# Altium PCB SWS_LEFT.PcbDoc
Units mm, origin at the board's own origin, x right, y up, seen from the top; angles counter-clockwise.
Board outline 46.26 x 38.25 mm, 2 copper layers (Top Layer, Bottom Layer), stack 1.17 mm thick; 17 components, 20 nets, 88 pads, 92 vias.
Unrouted connection lines stored in the file: 1.
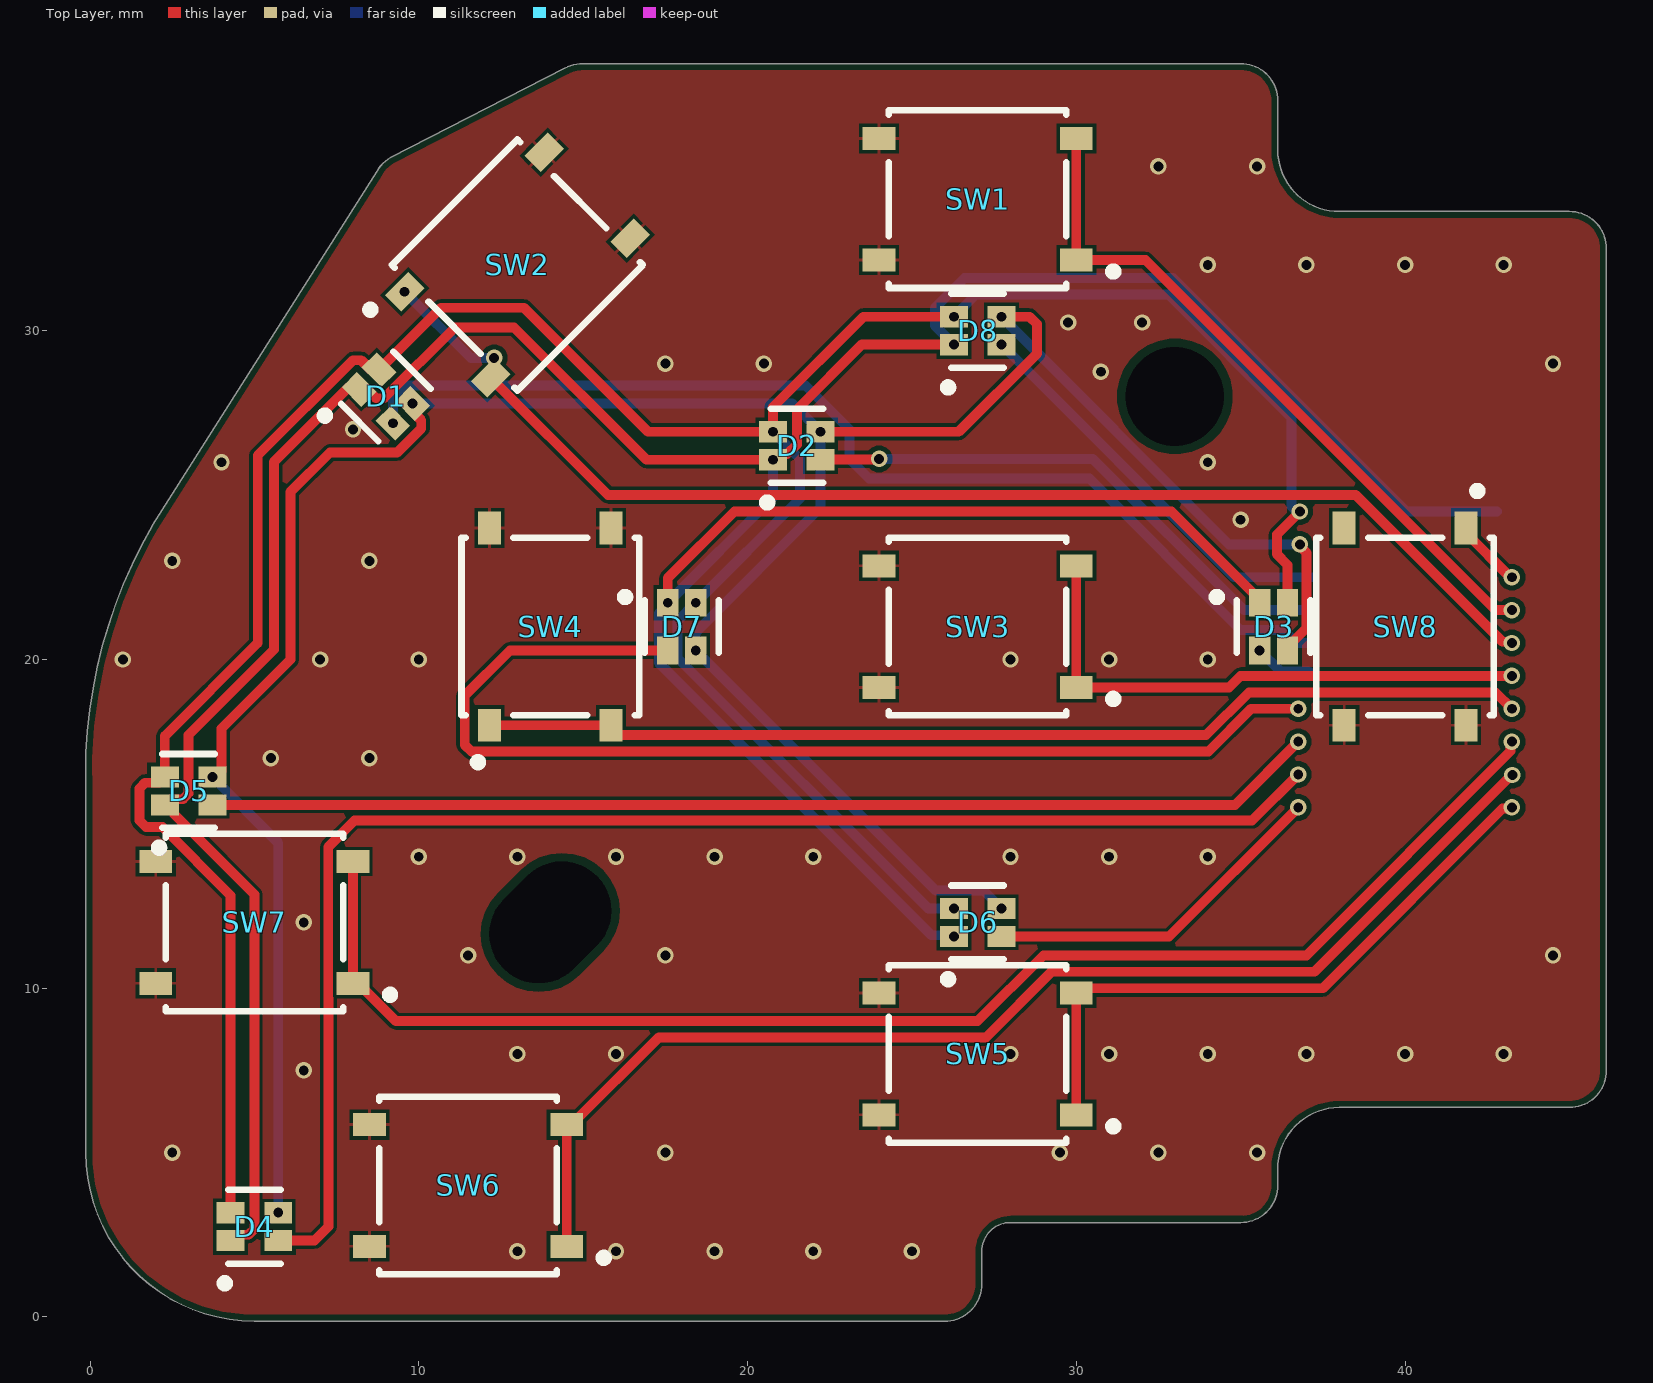
[diagram p0: Top Layer view]
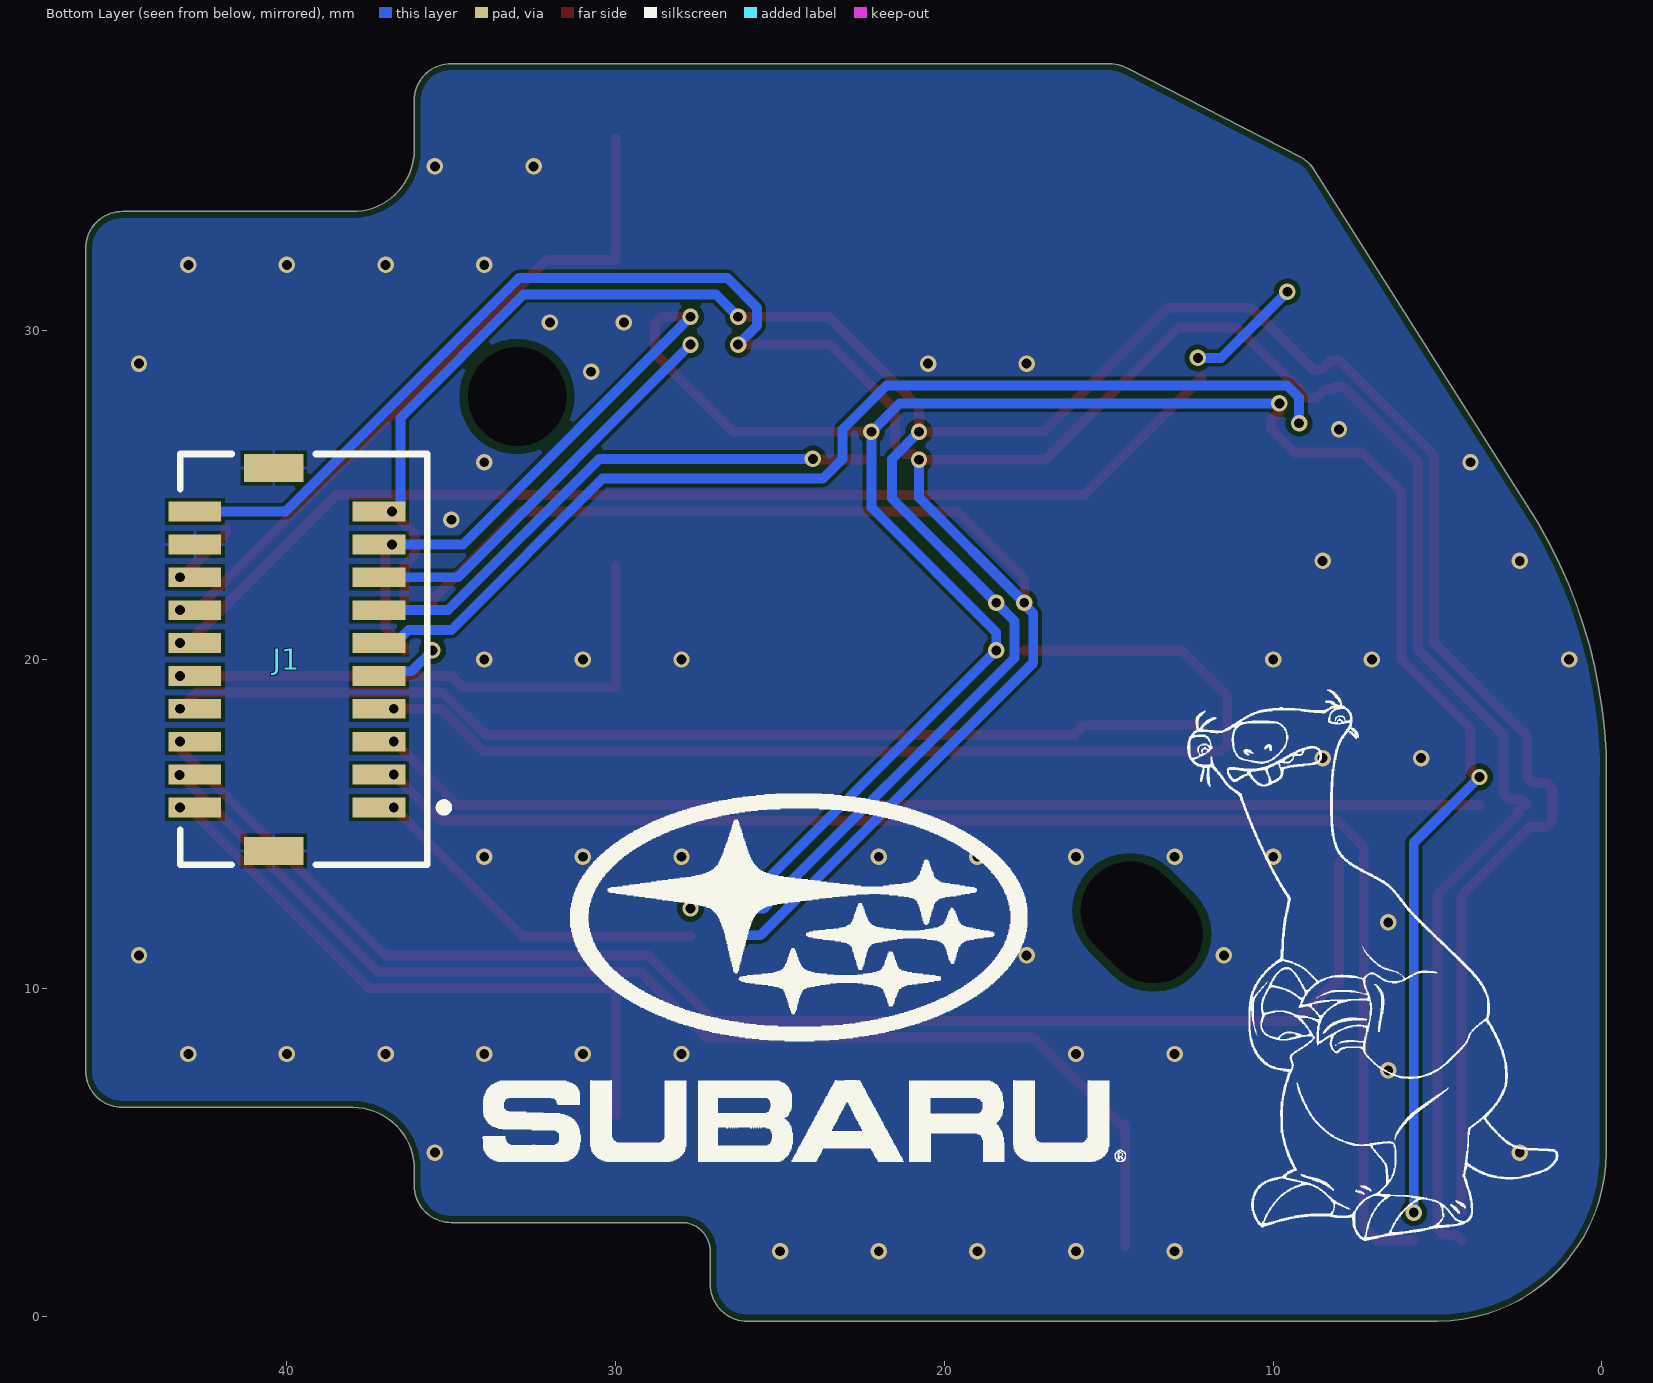
[diagram p1: Bottom Layer view, seen from below]
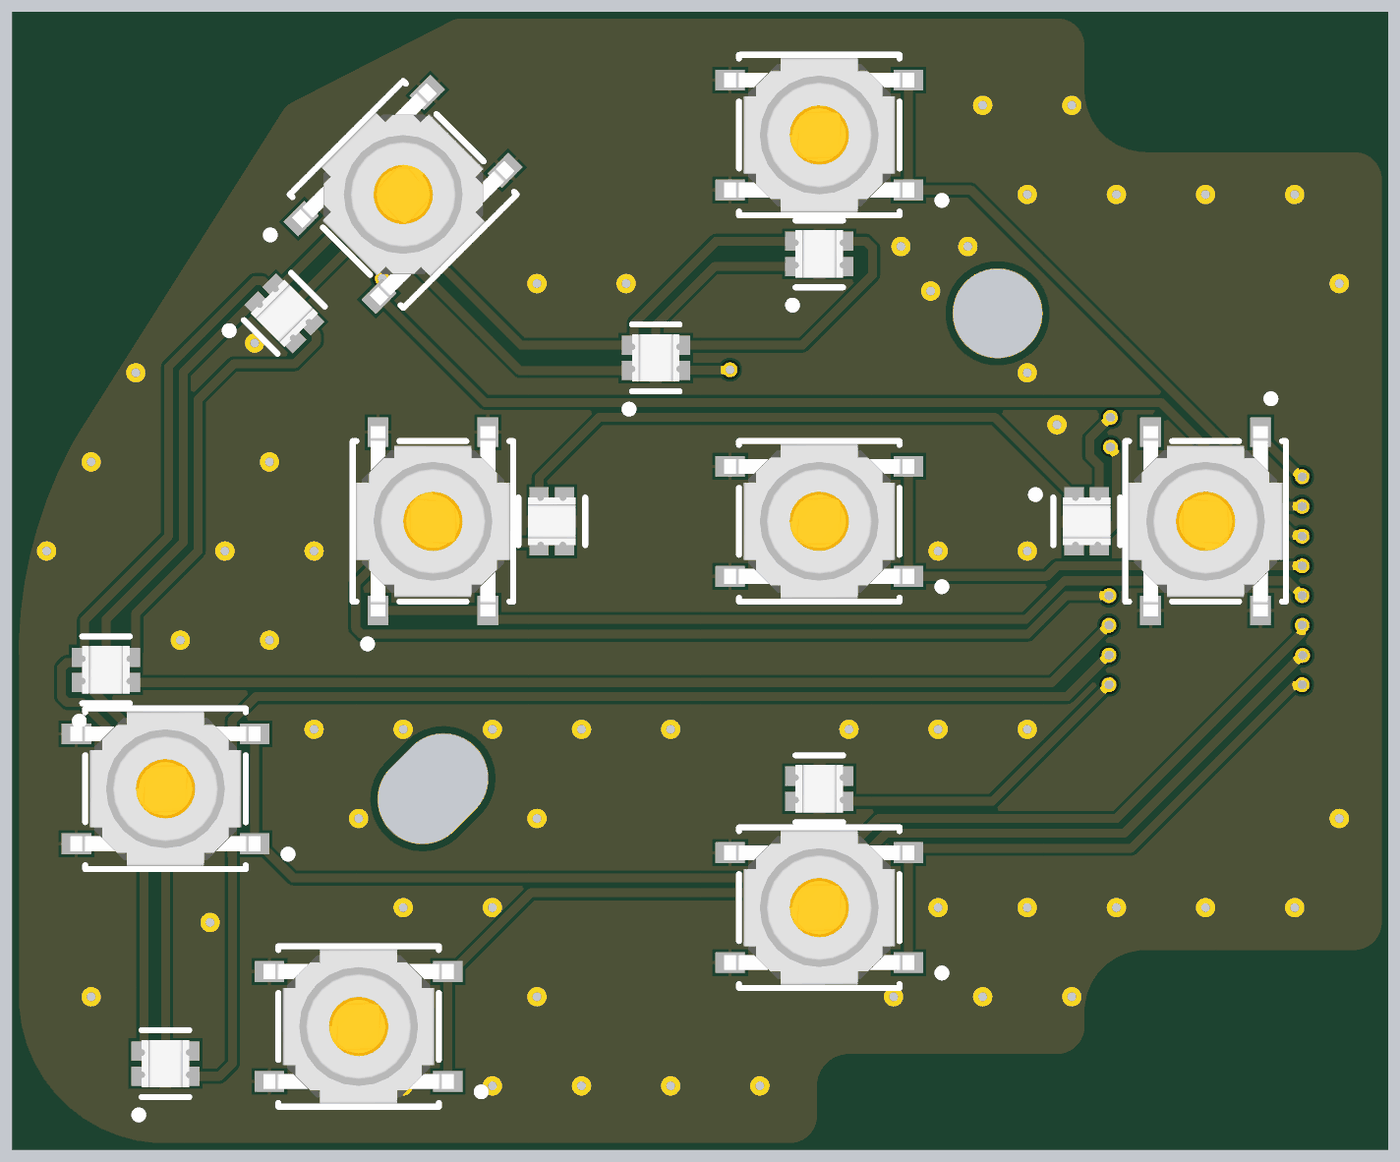
[diagram p2: 3D render of the assembled board from above, using the file's embedded part models]

## Layer stack, top to bottom
Top Solder: solder mask 0.0127, Solder Resist, Dk 3.8
Top Layer: signal copper 0.035
Dielectric: core 1.1, FR-4, Dk 4.5
Bottom Layer: signal copper 0.035
Bottom Solder: solder mask 0.0127, Solder Resist, Dk 3.8

## Board outline
4.999,-0.127 26,-0.127 ccw(c26,1) 27.127,1 27.127,2 cw(c28,2) 27.999,2.873 28,2.873 35,2.873 ccw(c35,4) 36.127,4 36.127,4.5 cw(c38,4.5) 37.999,6.373 38,6.373 45,6.373 ccw(c45,7.5) 46.127,7.5 46.127,32.5 ccw(c45,32.5) 45,33.627 38,33.627 cw(c38,35.5) 36.127,35.5 36.127,37 ccw(c35,37) 35,38.127 15,38.127 ccw(c15,37) 14.439,37.978 9.15,35.273 9.143,35.269 ccw(c9.707,34.293) 8.732,34.859 1.893,24.068 1.89,24.064 ccw(c14.99,16.5) -0.137,16.5 -0.127,16.451 -0.127,5 ccw(c5,5)

## Design rules (kind name [scope] priority, off if disabled: settings)
BoardOutlineClearance [All] p1: gap=0.2 ignorepadtopadclearanceinfootprint=FALSE
Clearance [All] p1: gap=0.102 ignorepadtopadclearanceinfootprint=FALSE except(0.127: Arc-Via Track-Via SMDPad-Via THPad-Via Via-Via Via-Fill Via-Poly Via-Region Via-Text; 0.25: Arc-Hole Track-Hole SMDPad-Hole THPad-Hole Via-Hole Fill-Hole Poly-Hole Region-Hole Text-Hole)
ComponentClearance [All] p1: gap=0.102 collisioncheckmode=3 verticalgap=0.102 showdistances=TRUE
DiffPairsRouting [All] p1: maxlimit=0.102 minlimit=0.102 mostfreqgap=0.102 toplayer_minwidth=0.102 toplayer_maxwidth=1816.048 toplayer_prefwidth=0.102 bottomlayer_minwidth=0.102 bottomlayer_maxwidth=1816.048 bottomlayer_prefwidth=0.102 maxuncoupledlength=12.7
Height [All] p1: minheight=0 maxheight=1816.048 prefheight=12.7
HoleSize [All] p1: absolutevalues=TRUE maxlimit=6.3 minlimit=0.2 maxpercent=80.000 minpercent=20.000
HoleToHoleClearance [All] p1: gap=0.25 allowstackedmicrovias=FALSE
MinimumAnnularRing [All] p1: minimumring=0.076
MinimumSolderMaskSliver [All] p1: minsoldermaskwidth=0
PlaneClearance [All] p1: clearance=0.102
PlaneConnect PlaneConnectPowerPads [InPadClass('PowerPads')] p1: planeconnectstyle=Direct reliefexpansion=0.508 reliefentries=4 reliefconductorwidth=0.254 reliefairgap=0.254
PlaneConnect [All] p2: pad.planeconnectstyle=Relief pad.reliefexpansion=0.3 pad.reliefentries=4 pad.reliefconductorwidth=0.102 pad.reliefairgap=0.102 via.planeconnectstyle=Direct via.reliefexpansion=0.3 via.reliefentries=4 via.reliefconductorwidth=0.127 via.reliefairgap=0.127
PolygonConnect PolygonConnectPowerPads [All vs (InPadClass('PowerPads'))] p1: connectstyle=Direct reliefconductorwidth=0.254 reliefentries=4 polygonreliefangle="90 Angle" airgapwidth=0.254
PolygonConnect [All] p2: thpad.connectstyle=Relief thpad.reliefconductorwidth=0.102 thpad.reliefentries=4 thpad.polygonreliefangle="90 Angle" thpad.airgapwidth=0.102 smdpad.connectstyle=Relief smdpad.reliefconductorwidth=0.102 smdpad.reliefentries=4 smdpad.polygonreliefangle="90 Angle" smdpad.airgapwidth=0.102 via.connectstyle=Direct via.reliefconductorwidth=0.127 via.reliefentries=4 via.polygonreliefangle="90 Angle" via.airgapwidth=0.127
RoutingVias [All] p1: holewidth=0.2 width=0.45 viastyle="Through Hole" minholewidth=0.2 minwidth=0.45 maxholewidth=6.3 maxwidth=6.55
SilkToSilkClearance [All] p1: silktosilkclearance=0
SilkToSolderMaskClearance [IsPad] p1: minsilkscreentomaskgap=0.102 clearancetoexposedcopper=TRUE
SolderMaskExpansion [All] p1: expansion=0.075 istentingtop=FALSE
Width [All] p1: maxlimit=1816.048 minlimit=0.102 preferedwidth=0.102
20 further rules are at their usual default settings.

## Components (designator, comment, footprint, x,y, rotation, side; value= is the part's Value field where it differs from the comment)
D1 "LTST-C19HE1WT" FP-LTST-C19HE1WT-MFG 9,28 r45 top locked
D2 "LTST-C19HE1WT" FP-LTST-C19HE1WT-MFG 21.5,26.5 r90 top locked
D3 "LTST-C19HE1WT" FP-LTST-C19HE1WT-MFG 36,21 r0 top locked
D4 "LTST-C19HE1WT" FP-LTST-C19HE1WT-MFG 5,2.75 r90 top locked
D5 "LTST-C19HE1WT" FP-LTST-C19HE1WT-MFG 3,16 r90 top locked
D6 "LTST-C19HE1WT" FP-LTST-C19HE1WT-MFG 27,12 r90 top locked
D7 "LTST-C19HE1WT" FP-LTST-C19HE1WT-MFG 18,21 r0 top locked
D8 "LTST-C19HE1WT" FP-LTST-C19HE1WT-MFG 27,30 r90 top locked
J1 "501190-2017" FP-501190-2017-MFG 40,20 r90 bottom
SW1 "PTS526SK15SMTR2LFS" FP-PTS526SK15SMTR2LFS-MFG 27,34 r180 top locked
SW2 "PTS526SK15SMTR2LFS" FP-PTS526SK15SMTR2LFS-MFG 13,32 r45 top locked
SW3 "PTS526SK15SMTR2LFS" FP-PTS526SK15SMTR2LFS-MFG 27,21 r180 top locked
SW4 "PTS526SK15SMTR2LFS" FP-PTS526SK15SMTR2LFS-MFG 14,21 r90 top locked
SW5 "PTS526SK15SMTR2LFS" FP-PTS526SK15SMTR2LFS-MFG 27,8 r180 top locked
SW6 "PTS526SK15SMTR2LFS" FP-PTS526SK15SMTR2LFS-MFG 11.5,4 r180 top locked
SW7 "PTS526SK15SMTR2LFS" FP-PTS526SK15SMTR2LFS-MFG 5,12 r180 top locked
SW8 "PTS526SK15SMTR2LFS" FP-PTS526SK15SMTR2LFS-MFG 40,21 r270 top locked

## Footprints (in the part's own frame and the unit in brackets; to place one, negate y for a bottom-side part, rotate by r counter-clockwise, add the part's x,y. Pads: shape width x height; smd on the part's side, far side on the other; paste and mask are expansions set on the pad)
FP-501190-2017-MFG [mm]
  rect 0.6x1.6 smd paste+0 mask+0: 1(-4.5,-2.8) 2(-4.5,2.8) 3(-3.5,-2.8) 4(-3.5,2.8) 5(-2.5,-2.8) 6(-2.5,2.8) 7(-1.5,-2.8) 8(-1.5,2.8) 9(-0.5,-2.8) 10(-0.5,2.8) 11(0.5,-2.8) 12(0.5,2.8) 13(1.5,-2.8) 14(1.5,2.8) 15(2.5,-2.8) 16(2.5,2.8) 17(3.5,-2.8) 18(3.5,2.8) 19(4.5,-2.8) 20(4.5,2.8)
  rect 0.85x1.8 smd paste+0 mask+0: 21(-5.825,0.4) 22(5.825,0.4)
  silkscreen extent -6.25,-4.9 6.25,3.24, body extent -6.15,-4.07 6.15,3.2, height 5.61
FP-LTST-C19HE1WT-MFG [mm]
  rect 0.65x0.85 smd paste+0 mask+0: 1(-0.425,0.725) 2(0.425,0.725) 3(0.425,-0.725) 4(-0.425,-0.725)
  silkscreen extent -1.85,-0.8 1.12,1.02, body extent -0.95,-1.25 0.95,1.25, height 0.25
FP-PTS526SK15SMTR2LFS-MFG [mm]
  rect 1x0.7 smd paste+0 mask+0: 1(-3,1.85) 2(3,1.85) 3(-3,-1.85) 4(3,-1.85)
  silkscreen extent -4.25,-2.7 2.7,2.7, body extent -3.6,-2.8 3.6,2.8, height 0.25

## Part data
D1 D2 D3 D4 D5 D6 D7 D8: library part CMP-2000-05201-2, "LED RGB DIFFUSED CHIP SMD", Case Code (Imperial)=0606, Case Code (Metric)=1616, Color=Blue, Forward Current=20mA, Forward Voltage=3.35V, Lens Color=White, Max Operating Temperature=80°C, Min Operating Temperature=-20°C, Package Quantity=3000, Reverse Voltage=5V, Case/Package=0606, Depth=1.6mm, Dominant Wavelength=470nm, Height=0.35mm, Lead Free="Lead Free", Length=1.6mm, Lens Style=Diffused, Lens Transparency=Diffused, Luminous Intensity=180mcd, Mount="Surface Mount", Number of Elements=3, Number of LEDs=3, Number of Pins=4, Packaging="Tape and Reel", Radiation Hardening=No, Test Current=20mA, Viewing Angle=130°, Width=1.6mm
J1: library part CMP-04776-000294-1, "CONN HEADER SMD 20POS 1MM", Color=Natural, Contact Resistance=20mR, Current Rating=1A, Max Operating Temperature=85°C, Min Operating Temperature=-40°C, Package Quantity=1100, Voltage Rating=50V, Connector Type="Male Pin", Contact Material=Bronze, Contact Plating=Gold, Contact Type="Male Pin", Depth=7.27mm, Fastening Type=Latch, Gender=Male, Glow Wire Compliant=Non-compliant, Housing Color=Natural, Housing Material=Thermoplastic, Lead Free="Lead Free", Length=12.3mm, Mount="Surface Mount", Number of Circuits=20, Number of Contacts=20, Number of Positions=20, Number of Rows=2, Orientation=Vertical, Packaging="Tape and Reel", Pitch=1mm, Radiation Hardening=No, Row Spacing=0.105inch, Series=Pico-Clasp, Termination=Solder, Voltage Rating (DC)=50V
SW1 SW2 SW3 SW4 SW5 SW6 SW7 SW8: library part CMP-10040-000013-1, "TACT 5.2 X 5.2, 1.5 MM H, 260GF,", Contact Current Rating=50mA, Contact Resistance=100mΩ, Manufacturer=C&K, Operating Force=250gf, Temperature="-20°C to +70°C", Temperature Range High=+70°C, Temperature Range Low=-20°C, Voltage Rating Dc=12V, Automotive=No, Category=Switch, ComponentLink2Description=Datasheet, ComponentLink2URL=https://www.ckswitches.com/media/2780/pts526.pdf, Device Class L1=Electromechanical, Device Class L2=Switches, Device Class L3="Tactile Switches", Digikey Description="TACT 5.2 X 5.2, 1.5 MM H, 260GF,", Electromechanical Life=200000Cycles, Height=1.65mm, Lead Free=Yes, Manufacturer Part Number=PTS526SK15SMTR2LFS, Octopart=https://octopart.com/pts526+sk15+smtr2+lfs-c%26k+components-100617999, Package=PTS526SK15SMTR2LFS, RoHS=TRUE, Standoff Height=0mm, Throw Configuration=SPST-NO

## Free pads (board coordinates)
  rrect50% 0.5x0.5 / inner round 0.5 / far side round 0.5 hole 3 slot 4 at 45 deg rot 45: 22(14,12)
  round 0.5 hole 3: 23(33,28)

## Via types
v1: diameter 0.5, hole 0.3, Top Layer to Bottom Layer, 92 vias

## Nets (pads, with @x,y where several pads share a name; then routed paths per layer and width w, separated by ;. In a path a pad name is that pad's centre, name@x,y a point inside that pad or via, vN(x,y) a via of type N, cw(c..) or ccw(c..) an arc to the next point about the centre after c; other vN are vias at no path point)
GND: J1.18 J1.21 J1.22 SW1.2 SW1.4 SW2.2 SW2.4 SW3.2 SW3.4 SW4.2 SW4.4 SW5.2 SW5.4 SW6.2 SW6.4 SW7.2 SW7.4 SW8.2 SW8.4
  other v1: 13,2 16,2 19,2 22,2 25,2 2.5,5 17.5,5 29.5,5 32.5,5 35.5,5 6.5,7.5 13,8 16,8 28,8 31,8 34,8 37,8 40,8 43,8 11.5,11 17.5,11 44.5,11 6.5,12 10,14 13,14 16,14 19,14 22,14 28,14 31,14 34,14 5.5,17 8.5,17 1,20 7,20 10,20 28,20 31,20 34,20 2.5,23 8.5,23 35,24.25 4,26 34,26 8,27 30.75,28.75 17.5,29 20.5,29 44.5,29 29.75,30.25 32,30.25 34,32 37,32 40,32 43,32 32.5,35 35.5,35
LED_GND_BLU: D1.3 D2.3 D3.3 D4.3 D5.3 D6.3 D7.3 D8.3 J1.17 | length 88.1
  Top Layer w0.3: v1(3.725,16.425) 3.825,16.425 4,16.6 4,17.9 6.1,20 6.1,25.1 7.3,26.3 9.346,26.3 10.076,27.029 10.076,27.278 9.813,27.54 v1(9.813,27.788) ; v1(22.225,26.925) 26.425,26.925 28.8,29.3 28.8,30.2 28.575,30.425 v1(27.725,30.425) ; D3.3 36.425,20.375 37.002,20.952 37.002,23.244 36.8,23.446 v1(36.8,23.5)
  Bottom Layer w0.3: v1(3.725,16.425) 5.725,14.425 v1(5.725,3.175) ; v1(9.813,27.788) 21.362,27.788 v1(22.225,26.925) 22.225,24.625 18.425,20.825 v1(18.425,20.275) 25.725,12.975 27.175,12.975 v1(27.725,12.425) ; v1(27.725,30.425) 34.65,23.5 v1(36.8,23.5)
LED_GND_GRN: D1.2 D2.2 D3.2 D4.2 D5.2 D6.2 D7.2 D8.2 J1.19 | length 91.6
  Top Layer w0.3: D4.2 4.275,12.825 2.2,14.9 1.7,14.9 1.5,15.1 1.5,16.074 1.676,16.25 2.1,16.25 D5.2 2.275,17.675 5.1,20.5 5.1,26.2 8.003,29.103 8.251,29.103 8.54,28.813 D1.2 10.675,30.7 13.2,30.7 16.975,26.925 v1(20.775,26.925) 20.775,27.675 23.525,30.425 v1(26.275,30.425) ; D3.2 36.425,22.875 36.1,23.2 36.1,23.8 v1(36.8,24.5)
  Bottom Layer w0.3: v1(20.775,26.925) 21.6,26.1 21.6,24.9 v1(18.425,21.725) 17.875,21.175 17.875,20.047 25.497,12.425 v1(26.275,12.425) ; v1(26.275,30.425) 26.95,31.1 32.8,31.1 36.55,27.35 36.55,24.65 36.7,24.5 v1(36.8,24.5)
LED_GND_RED: D1.1 D2.1 D3.1 D4.1 D5.1 D6.1 D7.1 D8.1 J1.20 | length 116
  Top Layer w0.3: D4.1 4.45,2.5 4.824,2.5 5,2.676 5,12.85 2.55,15.3 2.55,15.4 2.375,15.575 D5.1 2.45,15.75 2.824,15.75 3,15.926 3,17.7 5.6,20.3 5.6,26.014 7.869,28.283 8.116,28.283 D1.1 8.434,28.212 8.699,27.947 8.947,27.947 11.1,30.1 12.9,30.1 16.925,26.075 v1(20.775,26.075) 20.95,26.25 21.206,26.25 21.5,26.544 21.5,27.6 23.475,29.575 v1(26.275,29.575) ; v1(17.575,21.725) 17.575,22.475 19.6,24.5 32.9,24.5 35.575,21.825 D3.1
  Bottom Layer w0.3: v1(20.775,26.075) 20.775,24.925 v1(17.575,21.725) 17.575,21.671 17.3,21.396 17.3,19.9 25.587,11.613 26.237,11.613 v1(26.275,11.575) ; v1(26.275,29.575) 25.7,30.15 25.7,30.7 26.6,31.6 32.944,31.6 40.044,24.5 J1.20
LED_POS_0: D6.4 J1.1 | length 10.7
  Top Layer w0.3: D6.4 32.825,11.575 v1(36.75,15.5)
LED_POS_1: D4.4 J1.3 | length 43.7
  Top Layer w0.3: D4.4 6.825,2.325 7.25,2.75 7.25,9.694 7.248,9.696 7.248,14.304 8.044,15.1 35.35,15.1 v1(36.75,16.5)
LED_POS_2: D5.4 J1.5 | length 33.8
  Top Layer w0.3: D5.4 34.825,15.575 v1(36.75,17.5)
LED_POS_3: D7.4 J1.7 | length 34.2
  Top Layer w0.3: D7.4 12.775,20.275 11.4,18.9 11.4,17.4 11.6,17.2 34.018,17.2 35.318,18.5 v1(36.75,18.5)
LED_POS_4: D3.4 J1.9 | length 1.9
  Bottom Layer w0.3: v1(35.575,20.275) 36.207,19.643 37.057,19.643 J1.9
LED_POS_5: D1.4 J1.11 | length 32.7
  Bottom Layer w0.3: v1(9.212,27.187) 9.212,27.965 9.585,28.338 21.762,28.338 23.1,27 23.1,26.1 23.7,25.5 30.4,25.5 35,20.9 36.3,20.9 36.7,20.5 J1.11
LED_POS_6: D2.4 J1.13 | length 16.9
  Top Layer w0.3: D2.4 22.237,26.087 23.987,26.087 v1(24,26.1)
  Bottom Layer w0.3: v1(24,26.1) 30.5,26.1 35.1,21.5 J1.13
LED_POS_7: D8.4 J1.15 | length 12.4
  Bottom Layer w0.3: v1(27.725,29.575) 34.8,22.5 J1.15
SW_OUT_0: J1.2 SW5.1 SW5.3 | length 19.3
  Top Layer w0.3: SW5.1 SW5.3 30.15,10 37.5,10 42.962,15.462 43.212,15.462 v1(43.25,15.5)
SW_OUT_1: J1.4 SW6.1 SW6.3 | length 36.9
  Top Layer w0.3: SW6.1 SW6.3 14.65,5.85 17.3,8.5 27.25,8.5 29.25,10.5 37.25,10.5 43.236,16.486 v1(43.264,16.486)
SW_OUT_2: J1.6 SW7.1 SW7.3 | length 43.1
  Top Layer w0.3: SW7.3 SW7.1 8.15,10.15 9.3,9 27,9 29,11 37,11 43.212,17.212 43.212,17.462 v1(43.25,17.5)
SW_OUT_3: J1.8 SW4.1 SW4.3 | length 31.9
  Top Layer w0.3: SW4.1 SW4.3@15.7,18 ; SW4.3 15.85,17.9 16.05,17.7 33.95,17.7 35.25,19 42.75,19 v1(43.25,18.5)
SW_OUT_4: J1.10 SW3.1 SW3.3 | length 17.1
  Top Layer w0.3: SW3.3 SW3.1 34.65,19.15 35,19.5 v1(43.25,19.5)
SW_OUT_5: J1.12 SW2.1 SW2.3 | length 38
  Top Layer w0.3: SW2.3 15.757,25 38.5,25 42.962,20.538 43.212,20.538 v1(43.25,20.5)
  Bottom Layer w0.3: v1(9.571,31.187) 11.586,29.172 v1(12.293,29.172)
SW_OUT_6: J1.14 SW1.1 SW1.3 | length 21.4
  Top Layer w0.3: SW1.3 SW1.1 32.1,32.15 42.75,21.5 v1(43.25,21.5)
SW_OUT_7: J1.16 SW8.1 SW8.3 | length 2.1
  Top Layer w0.3: SW8.1 41.85,23.85 43.2,22.5 v1(43.25,22.5)

## Polygon pours and split planes (outlines as drawn)
GND on Bottom Layer "GND_L02_P001" (solid, remove dead copper, pour order 1): 4.999,-0.127 26,-0.127 ccw(c26,1) 27.127,1 27.127,2 cw(c28,2) 27.999,2.873 28,2.873 35,2.873 ccw(c35,4) 36.127,4 36.127,4.5 cw(c38,4.5) 37.999,6.373 38,6.373 45,6.373 ccw(c45,7.5) 46.127,7.5 46.127,32.5 ccw(c45,32.5) 45,33.627 38,33.627 cw(c38,35.5) 36.127,35.5 36.127,37 ccw(c35,37) 35,38.127 15,38.127 ccw(c15,37) 14.439,37.978 9.15,35.273 9.143,35.269 ccw(c9.707,34.293) 8.732,34.859 1.893,24.068 1.89,24.064 ccw(c14.99,16.5) -0.137,16.5 -0.127,16.451 -0.127,5 ccw(c5,5)
GND on Top Layer "GND_L01_P000" (solid, remove dead copper, pour order 0): 4.999,-0.127 26,-0.127 ccw(c26,1) 27.127,1 27.127,2 cw(c28,2) 27.999,2.873 28,2.873 35,2.873 ccw(c35,4) 36.127,4 36.127,4.5 cw(c38,4.5) 37.999,6.373 38,6.373 45,6.373 ccw(c45,7.5) 46.127,7.5 46.127,32.5 ccw(c45,32.5) 45,33.627 38,33.627 cw(c38,35.5) 36.127,35.5 36.127,37 ccw(c35,37) 35,38.127 15,38.127 ccw(c15,37) 14.439,37.978 9.15,35.273 9.143,35.269 ccw(c9.707,34.293) 8.732,34.859 1.893,24.068 1.89,24.064 ccw(c14.99,16.5) -0.137,16.5 -0.127,16.451 -0.127,5 ccw(c5,5)

## Silkscreen, mask and mechanical layers (free items; w line width, h text height)
Bottom Overlay:
  drawing of 29 lines, arcs and shapes, not listed
Mechanical 1:
  lines w0.254: -0.01,16.5 cw(c14.99,16.5) 2,24 8.841,34.793 cw(c9.707,34.293) 9.207,35.159 14.5,37.866 cw(c15,37) 15,38 35,38 cw(c35,37) 36,37 36,35 ; 0,16.5 0,5 ccw(c5,5) 5,0 26,0 ccw(c26,1) 27,1 27,2 cw(c28,2) 28,3 35,3 ccw(c35,4) 36,4 36,4.5 cw(c38,4.5) 38,6.5 45,6.5 ccw(c45,7.5) 46,7.5 46,32.5 ccw(c45,32.5) 45,33.5 38,33.5 cw(c38,35.5) 36,35.5